# Altium PCB PeltierDrv_part.PcbDoc
Units mm, origin at the board's own origin, x right, y up, seen from the top; angles counter-clockwise.
Board outline 50 x 50 mm, 2 copper layers (Top Layer, Bottom Layer); 53 components, 47 nets, 194 pads, 31 vias.
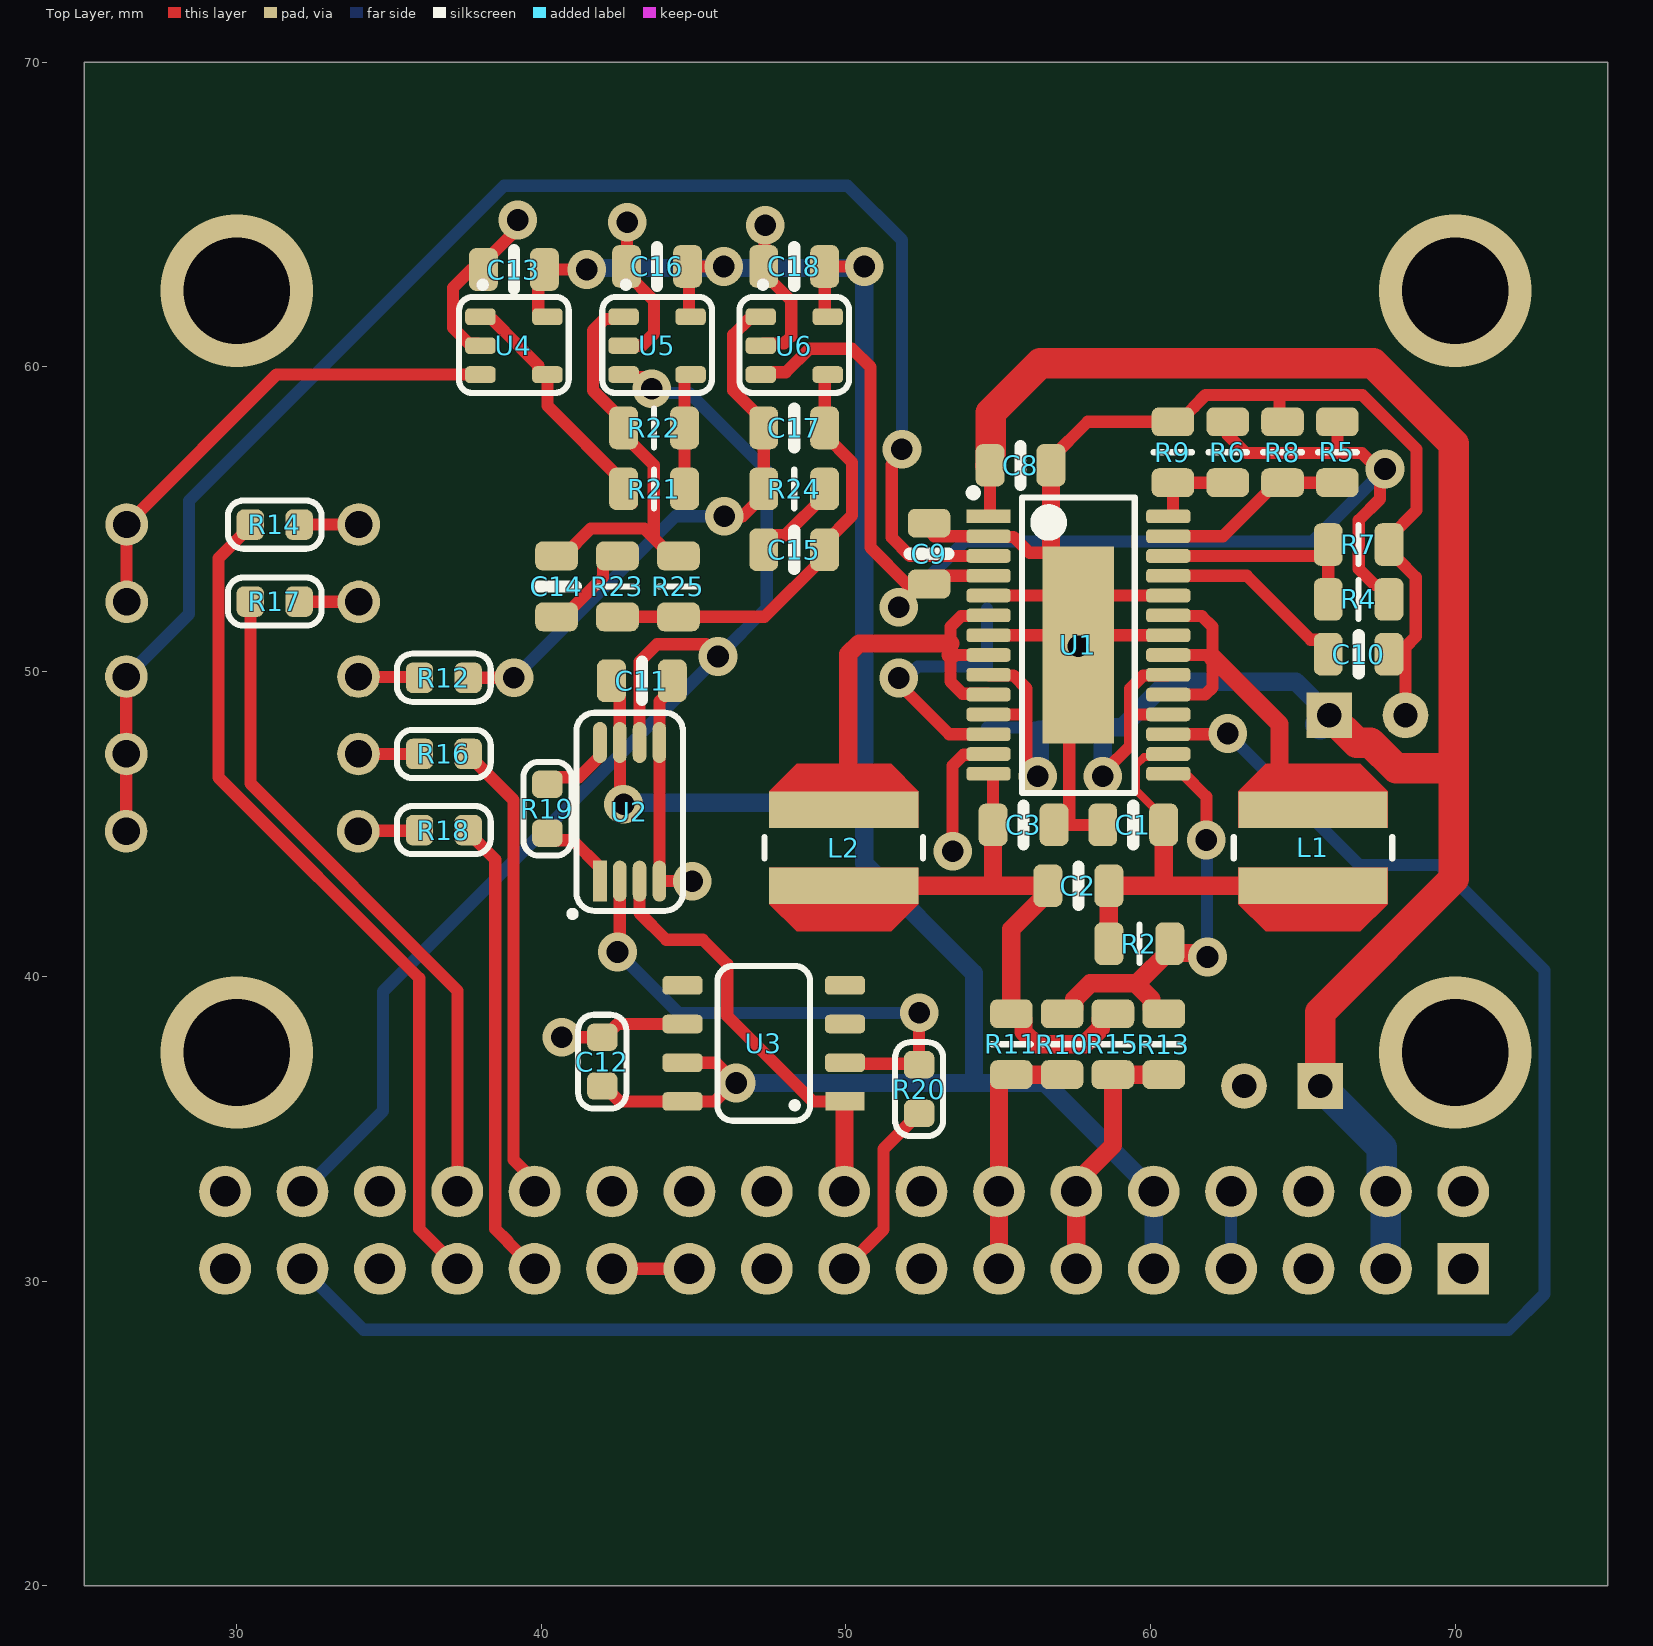
[diagram p0: Top Layer view]
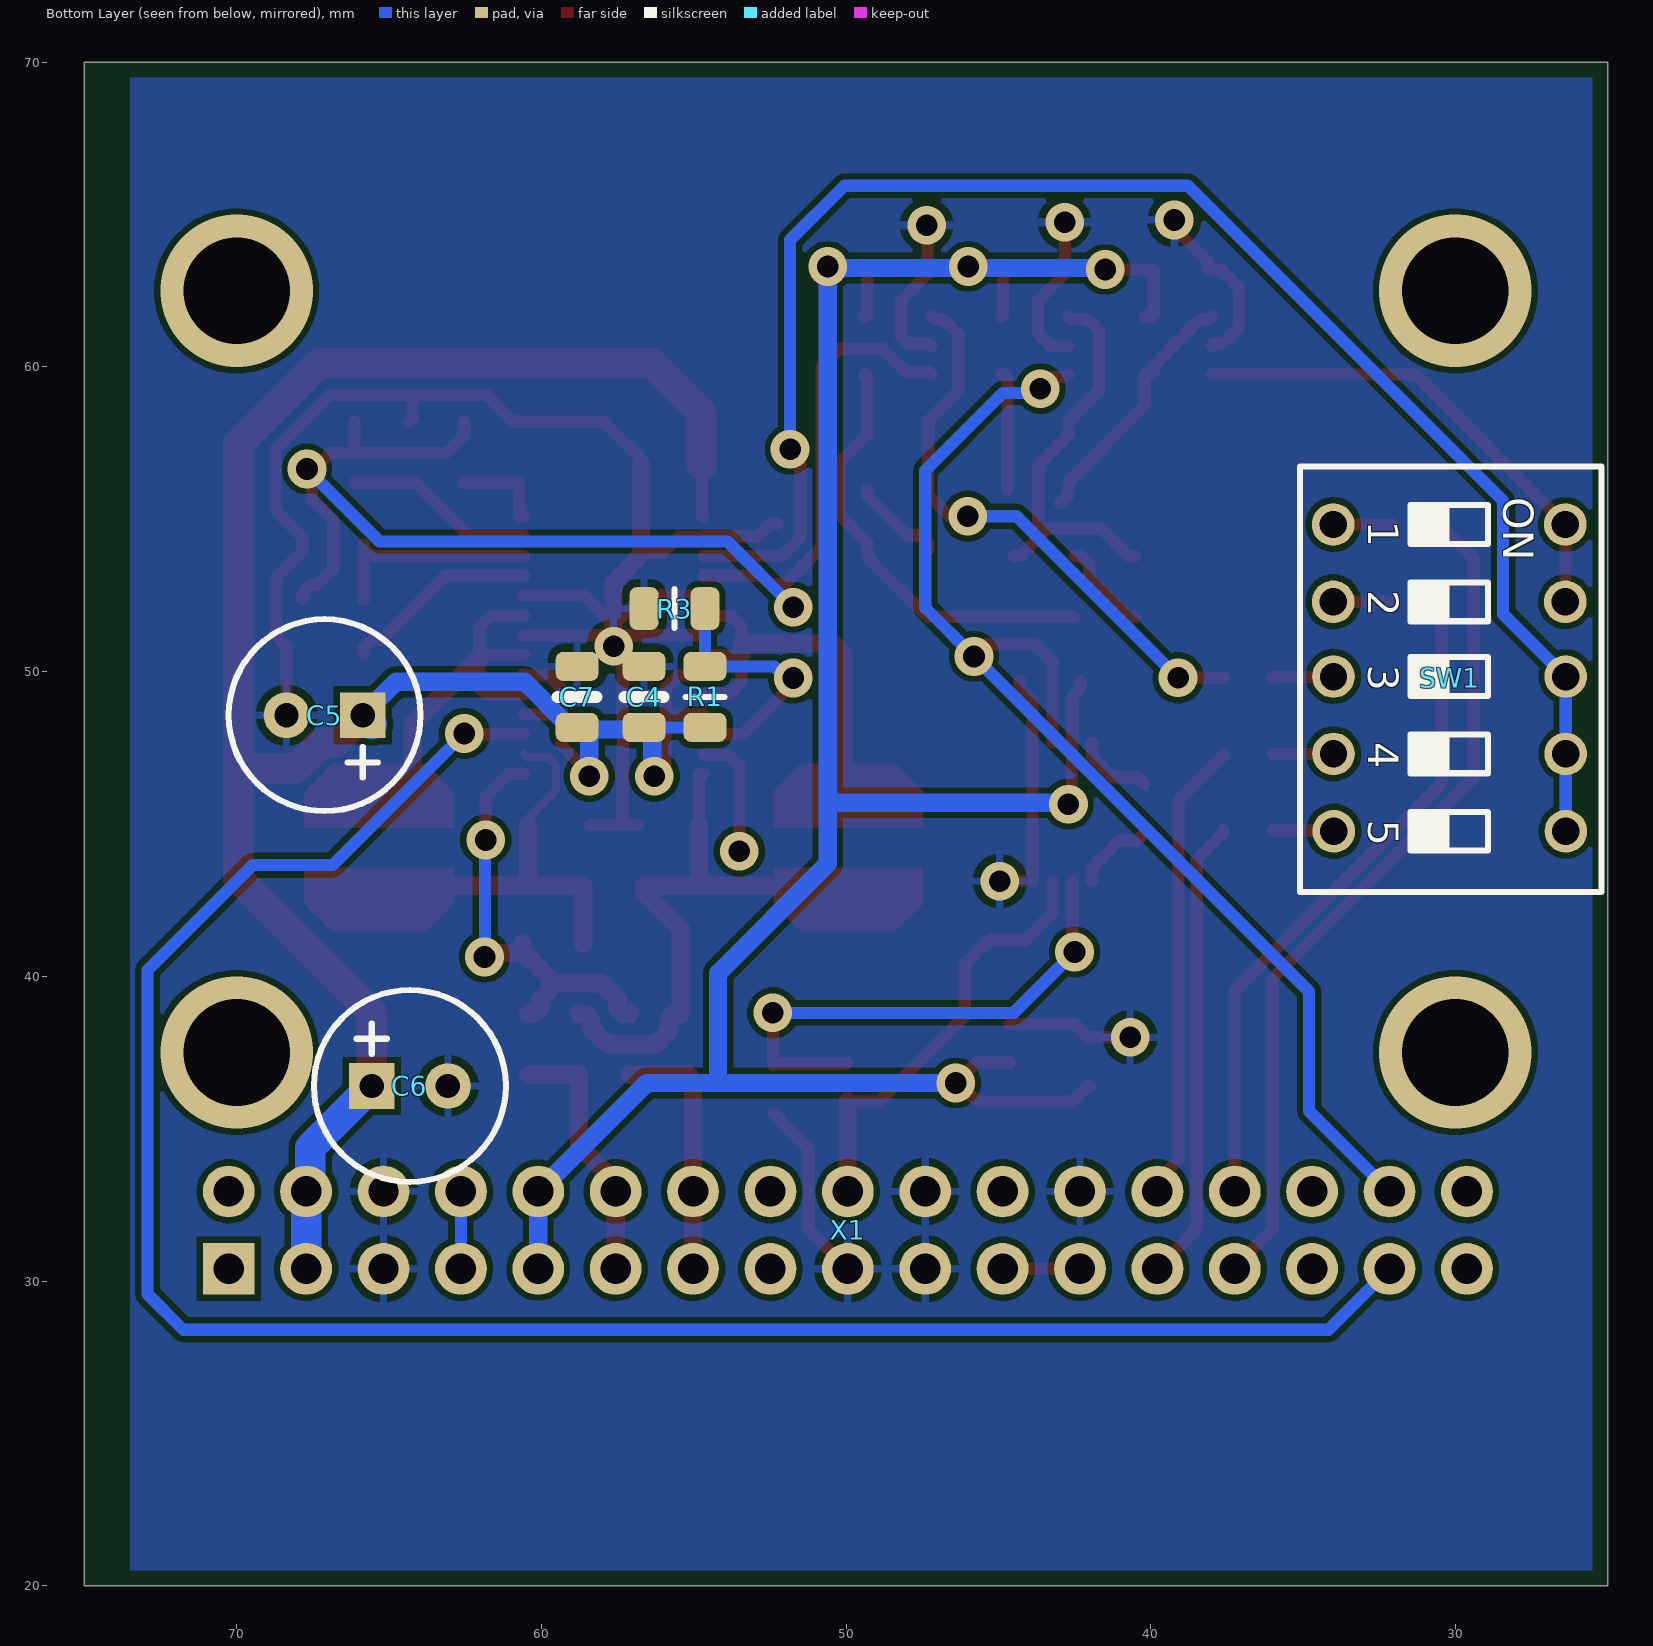
[diagram p1: Bottom Layer view, seen from below]
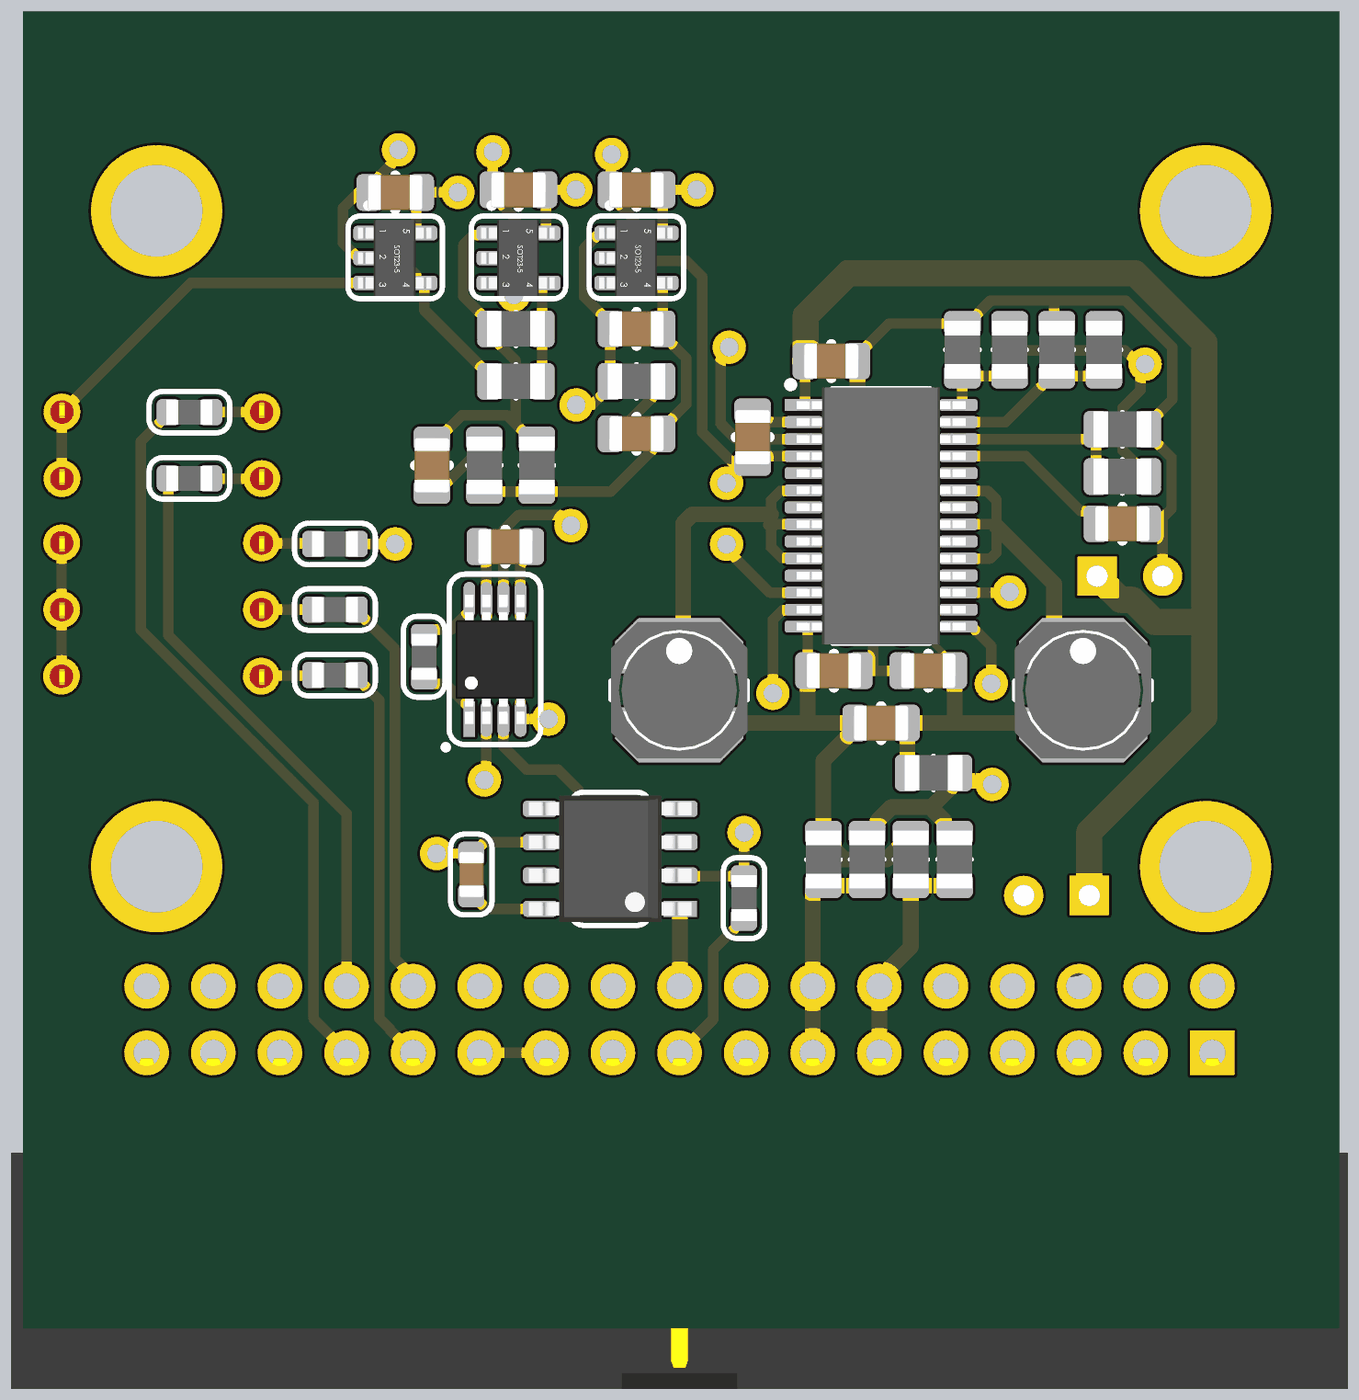
[diagram p2: 3D render of the assembled board from above, using the file's embedded part models]
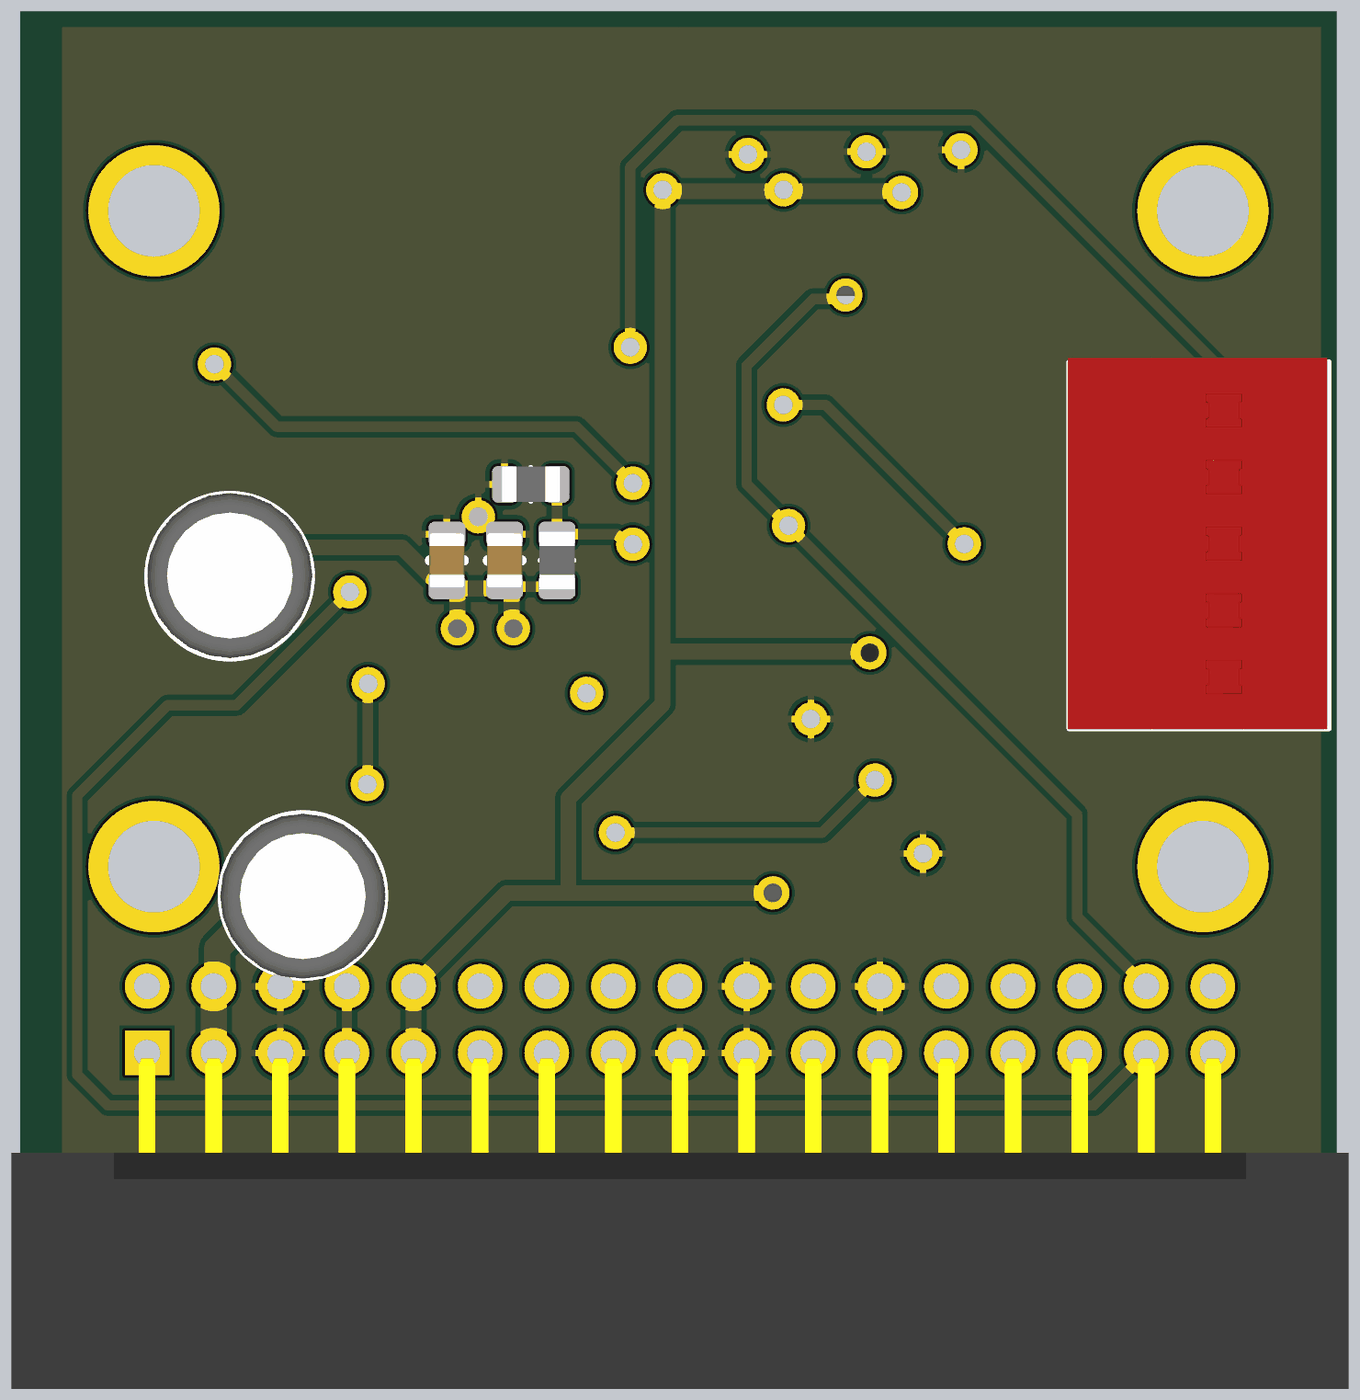
[diagram p3: 3D render of the assembled board from below, using the file's embedded part models]

## Layer stack, top to bottom
Top Solder: solder mask 0.0102, Solder Resist, Dk 3.5
Top Layer: signal copper 0.0356
Dielectric 1: dielectric 0.32, FR-4, Dk 4.8
Bottom Layer: signal copper 0.0356
Bottom Solder: solder mask 0.0102, Solder Resist, Dk 3.5

## Board outline
25,20 75,20 75,70 25,70

## Design rules (kind name [scope] priority, off if disabled: settings)
Clearance [All] p1: gap=0.2 ignorepadtopadclearanceinfootprint=FALSE
PolygonConnect [All] p1: connectstyle=Relief reliefconductorwidth=0.254 reliefentries=4 polygonreliefangle="90 Angle" airgapwidth=0.254
RoutingVias [All] p1: holewidth=0.711 width=1.27 viastyle="Through Hole" minholewidth=0.711 minwidth=1.27 maxholewidth=0.711 maxwidth=1.27
SolderMaskExpansion [All] p1: expansion=0.102 istentingtop=FALSE
Width [All] p1: maxlimit=10 minlimit=0.254 preferedwidth=0.5
30 further rules are at their usual default settings.

## Classes and differential pairs
component class TEMP: C11 C12 R19 R20 U2 U3
component class REG: C13 C14 C15 C16 C17 C18 R21 R22 R23 R24 R25 U4 U5 U6
component class main: R10 R11 R12 R13 R14 R15 R16 R17 R18 SW1 X1
component class DRV: C1 C2 C3 C4 C5 C6 C7 C8 C9 C10 J? L1 L2 R1 R2 R3 R4 R5 R6 R7 R8 R9 U1

## Components (designator, comment, footprint, x,y, rotation, side; value= is the part's Value field where it differs from the comment)
C1 "0603 1u 6.3V" CAP_0805 59.428,44.972 r180 top
C2 "0805 10u 6.3V" CAP_0805 57.628,42.972 r180 top
C3 "0603 1u 6.3V" CAP_0805 55.828,44.972 r0 top
C4 "0603 1u 6.3V" CAP_0805 56.628,49.172 r90 bottom
C5 "47u 63V" "CAP 6.3x11" 67.128,48.572 r180 bottom
C6 "47u 63V" "CAP 6.3x11" 64.3,36.4 r0 bottom
C7 "0603 1u 6.3V" CAP_0805 58.828,49.172 r90 bottom
C8 "0603 1u 6.3V" CAP_0805 55.728,56.772 r0 top
C9 "0603 0.1u 6.3V" CAP_0805 52.728,53.872 r90 top
C10 "0603 1u 6.3V" CAP_0805 66.828,50.572 r0 top
C11 "0603 1u 6.3V" CAP_0805 43.3,49.7 r180 top
C12 "0603 1u 6.3V" CAP_0603 42,37.2 r270 top
C13 "100n" CAP_0805 39.1,63.2 r180 top
C14 "100n" CAP_0805 40.5,52.8 r270 top
C15 "100n" CAP_0805 48.3,54 r180 top
C16 "100n" CAP_0805 43.8,63.3 r180 top
C17 "100n" CAP_0805 48.3,58 r180 top
C18 "100n" CAP_0805 48.3,63.3 r180 top
L1 "LQH5BPN3R3NT0L" IND_5050 65.328,44.222 r90 top
L2 "LQH5BPN3R3NT0L" IND_5050 49.928,44.222 r90 top
R1 "0805 ?" RES_0805 54.628,49.172 r270 bottom
R2 "0805 50m" RES_0805 59.628,41.072 r0 top
R3 "0805 ?" RES_0805 55.628,52.072 r180 bottom
R4 "0805 ?" RES_0805 66.828,52.372 r0 top
R5 "0805 ?" RES_0805 66.128,57.202 r90 top
R6 "0805 ?" RES_0805 62.528,57.202 r90 top
R7 "0805 ?" RES_0805 66.828,54.172 r180 top
R8 "0805 ?" RES_0805 64.328,57.202 r270 top
R9 "0805 ?" RES_0805 60.728,57.202 r270 top
R10 "0" RES_0805 57.095,37.772 r270 top
R11 "0" RES_0805 55.428,37.772 r270 top
R12 "200" RES_0603 36.8,49.8 r180 top
R13 "0" RES_0805 60.428,37.772 r270 top
R14 "200" RES_0603 31.25,54.825 r0 top
R15 "0" RES_0805 58.761,37.772 r270 top
R16 "200" RES_0603 36.8,47.3 r180 top
R17 "200" RES_0603 31.25,52.3 r0 top
R18 "200" RES_0603 36.8,44.8 r180 top
R19 "?" RES_0603 40.2,45.5 r90 top
R20 "?" RES_0603 52.4,36.3 r90 top
R21 "?" RES_0805 43.7,56 r0 top
R22 "?" RES_0805 43.7,58 r180 top
R23 "?" RES_0805 42.5,52.8 r270 top
R24 "?" RES_0805 48.3,56 r180 top
R25 "?" RES_0805 44.5,52.8 r270 top
SW1 "?" SWD1-5 30.199,53.56 r180 bottom
U1 "MAX1968" TSSOP28+EP 57.628,50.872 r0 top
U2 "INA333" MSOP-8 42.9,45.4 r90 top
U3 "REF200" SO8-150 47.3,37.8 r180 top
U4 "AD8065ART" sot235 39.1,60.7 r270 top
U5 "AD8065ART" sot235 43.8,60.7 r270 top
U6 "AD8065ART" sot235 48.3,60.7 r270 top
X1 "?" BH-34 70.26,32.94 r180 bottom

## Footprints (in the part's own frame and the unit in brackets; to place one, negate y for a bottom-side part, rotate by r counter-clockwise, add the part's x,y. Pads: shape width x height; smd on the part's side, far side on the other; paste and mask are expansions set on the pad)
BH-34 [mm]
  rect 1.7x1.7 hole 1: 1(0,-2.54)
  round 1.7 hole 1: 2(0,0) 3(2.54,-2.54) 4(2.54,0) 5(5.08,-2.54) 6(5.08,0) 7(7.62,-2.54) 8(7.62,0) 9(10.16,-2.54) 10(10.16,0) 11(12.7,-2.54) 12(12.7,0) 13(15.24,-2.54) 14(15.24,0) 15(17.78,-2.54) 16(17.78,0) 17(20.32,-2.54) 18(20.32,0) 19(22.86,-2.54) 20(22.86,0) 21(25.4,-2.54) 22(25.4,0) 23(27.94,-2.54) 24(27.94,0) 25(30.48,-2.54) 26(30.48,0) 27(33.02,-2.54) 28(33.02,0) 29(35.56,-2.54) 30(35.56,0) 31(38.1,-2.54) 32(38.1,0) 33(40.64,-2.54) 34(40.64,0)
  body extent -5.17,-15.35 45.81,-2.75, height 8.67
"CAP 6.3x11" [mm] "Capacitor"
  rect 1.5x1.5 hole 0.8: 1(1.266,-0.001)
  round 1.5 hole 0.8: 2(-1.234,-0.001)
  silkscreen extent -3.13,-3.15 3.17,3.15, body extent -3.13,-3.13 3.17,3.17, height 11.2
CAP_0603 [mm] "Chip Resistor, EIA 0603, Metric 1608, Body 1.6x0.8mm, IPC Medium Density"
  rrect50% 0.9x1 smd: 1(-0.8,0) 2(0.8,0)
  silkscreen extent -1.54,-0.79 1.54,0.79, body extent -0.88,-0.48 0.87,0.48, height 0.85
CAP_0805 [mm] "Chip Resistor, EIA 0805, Metric 2012, Body 2.0x1.2mm, IPC Medium Density"
  rrect50% 0.95x1.4 smd: 1(-1,0) 2(1,0)
  silkscreen extent 0,-0.64 0,0.64, body extent -1.05,-0.67 1.05,0.68, height 0.9
IND_5050 [mm] "SMD Inductor, 5mm L X 5mm W X 2mm H, TDK VLCF5020-1 Case"
  rect 1.2x4.9 smd: 1(-1.25,0) 2(1.25,0)
  Top Layer region: 2.75,1.55 1.85,2.45 0.65,2.45 0.65,-2.45 1.85,-2.45 2.75,-1.55
  Top Layer region: -2.75,-1.55 -1.85,-2.45 -0.65,-2.45 -0.65,2.45 -1.85,2.45 -2.75,1.55
  silkscreen extent -0.35,-2.6 0.35,2.6, body extent -2.6,-2.6 2.6,2.6, height 2
MSOP-8 [mm]
  rect 1.35x0.45 smd: 1(-2.275,0.975)
  oval 1.35x0.45 smd: 2(-2.275,0.325) 3(-2.275,-0.325) 4(-2.275,-0.975) 5(2.275,-0.975) 6(2.275,-0.325) 7(2.275,0.325) 8(2.275,0.975)
  silkscreen extent -3.45,-1.75 3.25,1.97, body extent -2.46,-1.5 2.46,1.5, height 1.1
RES_0603 [mm] "Chip Resistor, EIA 0603, Metric 1608, Body 1.6x0.8mm, IPC Medium Density"
  rrect50% 0.9x1 smd: 1(-0.8,0) 2(0.8,0)
  silkscreen extent -1.54,-0.79 1.54,0.79, body extent -0.87,-0.47 0.88,0.48, height 0.55
RES_0805 [mm] "Chip Resistor, EIA 0805, Metric 2012, Body 2.0x1.2mm, IPC Medium Density"
  rrect50% 0.95x1.4 smd: 1(-1,0) 2(1,0)
  silkscreen extent 0,-0.64 0,0.64, body extent -1.1,-0.67 1.1,0.68, height 0.6
SO8-150 [mil]
  rect 50x24 smd mask+4: 1(-105,75)
  rrect50% 52x24 smd mask+4: 2(-105,25) 3(-105,-25) 4(-105,-75) 5(105,-75) 6(105,-25) 7(105,25) 8(105,75)
  silkscreen extent -60,-100 60,100, body extent -122,-95 122,95, height 67
sot235 [mm] "SOT23, 5-Leads, Body 2.9x1.3mm, Pitch 0.95mm, Lead Span 2.5mm"
  rrect50% 0.55x1 smd: 1(-0.95,-1.1) 2(0,-1.1) 3(0.95,-1.1) 4(0.95,1.1) 5(-0.95,1.1)
  silkscreen extent -2.1,-1.8 1.55,1.8, body extent -1.45,-1.42 1.45,1.38, height 1.09
SWD1-5 [mm] "Body 7.1x7.5mm, 2 Ways SPST DIP Switch, Thru Hole, TYCO AD Series"
  round 1.4 hole 0.9: 1(-3.81,1.27) 2(-3.81,-1.27) 3(-3.801,-3.72) 4(-3.801,-6.26) 5(-3.791,-8.8) 6(3.829,-8.8) 7(3.819,-6.26) 8(3.819,-3.72) 9(3.81,-1.27) 10(3.81,1.27)
  silkscreen extent -4.9,-10.79 5,3.18, body extent -4.95,-10.83 4.95,3.33, height 6.8
TSSOP28+EP [mm] "SOP, 0.65mm pitch; 28 pin, 4.50mm W X 9.70mm L (thermal tab 6.46 X 2.35mm), IPC Medium Density"
  rect 1.45x0.45 smd: 1(-2.95,4.225)
  rrect50% 1.45x0.45 smd: 2(-2.95,3.575) 3(-2.95,2.925) 4(-2.95,2.275) 5(-2.95,1.625) 6(-2.95,0.975) 7(-2.95,0.325) 8(-2.95,-0.325) 9(-2.95,-0.975) 10(-2.95,-1.625) 11(-2.95,-2.275) 12(-2.95,-2.925) 13(-2.95,-3.575) 14(-2.95,-4.225) 15(2.95,-4.225) 16(2.95,-3.575) 17(2.95,-2.925) 18(2.95,-2.275) 19(2.95,-1.625) 20(2.95,-0.975) 21(2.95,-0.325) 22(2.95,0.325) 23(2.95,0.975) 24(2.95,1.625) 25(2.95,2.275) 26(2.95,2.925) 27(2.95,3.575) 28(2.95,4.225)
  rect 2.35x6.46 smd: 29(0,0)
  silkscreen extent -3.57,-4.85 1.85,5.12, body extent -3.22,-4.9 3.22,4.9, height 1.2

## Part data
C1 C2 C3 C4 C7 C8 C9 C10 C11 C12 C13 C14 C15 C16 C17 C18: library part Capacitor, "Конденсатор"
C5 C6: library part CapacitorEl, "Конденсатор электролитический", ValueBOM=47u, ValueSCH="47u 63V"
L1 L2: library part IND, "Индуктивность"
R1 R2 R3 R4 R5 R6 R7 R8 R9 R19 R20 R21 R22 R23 R24 R25: library part Resisitor, "Резистор"
R10 R11 R12 R13 R14 R15 R16 R17 R18: library part Resisitor, "Резистор", ValueBOM="0805 10k 0.125", ValueSCH=10k, MarkPCB=103
SW1: library part SWD1-5, "Переключатель 2 группы прямой: / SWD1-5; / DS1040-05RN; / DS1040-05BN; / BD05"
U1: "Драйвер пельтье"
U2: "Инструментальный усилитель", HelpURL=C:\Datasheets\INA333.pdf, MarkPCB=INA333, ValueBOM=INA333, ValueSCH=INA333
U3: "Источник опорного тока", HelpURL=C:\Datasheets\REF200.pdf, MarkPCB=REF200, ValueBOM=REF200, ValueSCH=REF200
U4 U5 U6: library part "OPAMP SOT235", "Операционный усилитель"
X1: library part "Connector 17x2", ValueSCH=Model

## Via types
v1: diameter 1.27, hole 0.711, Top Layer to Bottom Layer, 27 vias
v2: diameter 5, hole 3.5, Top Layer to Bottom Layer, 4 vias

## Nets (pads, with @x,y where several pads share a name; then routed paths per layer and width w, separated by ;. In a path a pad name is that pad's centre, name@x,y a point inside that pad or via, vN(x,y) a via of type N, cw(c..) or ccw(c..) an arc to the next point about the centre after c; other vN are vias at no path point)
1.5REF: C9.1 R4.2 R5.2 R6.2 U1.4 U6.3 | length 45.7
  Top Layer w0.4: U6.3 47.275,59.825 48.025,59.825 48.8,60.6 50.2,60.6 50.8,60 50.8,54.075 52.003,52.872 C9.1@52.228,52.872 ; v1(51.735,52.118) 51.735,52.353 52.228,52.846 C9.1@52.228,52.872 ; U1.4 52.748,53.147 52.473,52.872 C9.1@52.228,52.872 ; R6.2 62.528,57.772 63.128,57.172 66.028,57.172 ; R5.2 66.128,57.272 66.028,57.172 ; R4.2 67.828,52.577 67.556,52.849 67.351,52.849 67.128,53.072 66.828,53.372 66.828,54.972 67.526,55.67 67.526,56.488 v1(67.692,56.654) 67.457,56.654 66.939,57.172 66.028,57.172
  Bottom Layer w0.4: v1(51.735,52.118) 53.889,54.272 65.31,54.272 v1(67.692,56.654)
!SHDN: U1.17 X1.31 | length 68.3
  Top Layer w0.4: U1.17 62.503,47.947 v1(62.528,47.972)
  Bottom Layer w0.4: X1.31 34.16,28.4 71.75,28.4 72.925,29.575 72.925,40.2 69.475,43.65 66.85,43.65 v1(62.528,47.972)
+2.5VREF: X1.2
+3.3V: C11.2 C12.2 C13.1 C16.1 C18.1 U2.7 U3.7 U3.8 U4.5 U5.5 U6.5 X1.9 X1.10 | length 83.3
  Top Layer w0.4: C13.1@39.9,63.2 39.9,61.725 39.975,61.65 U4.5 ; C13.1 41.3,63.2 v1(41.49,63.2) ; C12.2 42.064,36.4 42.569,35.895 U3.8 45.695,35.895 46.3,36.5 v1(46.4,36.5) 45.735,37.165 U3.7 ; C11.2 42.3,49.455 42.575,49.18 U2.7 42.585,47.665 42.585,45.765 v1(42.7,45.65) ; U5.5 44.85,61.7 44.85,63.25 C16.1 v1(45.99,63.3) ; U6.5 49.375,61.65 49.3,61.725 C18.1 50.3,63.3 v1(50.6,63.3)
  Bottom Layer w0.6: v1(41.49,63.2) 41.54,63.25 45.99,63.25 50.55,63.25 v1(50.6,63.3) 50.6,45.7 ; v1(42.7,45.65) 42.75,45.7 50.6,45.7 ; v1(46.4,36.5) 54.2,36.5 ; X1.9 X1.10 56.54,36.5 54.2,36.5 ; 50.6,45.7 50.6,43.7 54.2,40.1 54.2,36.5
+5V: C4.1 C5.1 C6.1 C7.1 C8.1 R1.2 U1.1 U1.9 U1.11 U1.18 U1.20 X1.3 X1.4 | length 81.8
  Top Layer w0.4: U1.11 55.903,48.597 55.928,48.572 ; U1.9 54.703,49.872 55.503,49.872 55.928,49.447 55.928,48.572 ; U1.1 54.703,55.097 54.728,55.122 C8.1 ; v1(56.293,46.572) 56.293,46.607 55.928,46.972 55.928,48.572 ; v1(58.428,46.572) 58.528,46.672 58.528,46.772 59.328,47.572 59.328,48.51 ; U1.18 59.415,48.597 59.328,48.51 ; U1.20 60.553,49.872 59.753,49.872 59.328,49.447 59.328,48.51
  Top Layer w1: C8.1 54.753,56.797 54.753,58.503 56.375,60.125 67.3,60.125 69.95,57.475 69.95,46.825 ; C6.1 65.566,38.816 69.95,43.2 69.95,46.825 ; C5.1 66.761,47.672 67.21,47.672 68.057,46.825 69.95,46.825
  Bottom Layer w0.4: R1.2 56.293,48.172 C4.1@56.36,48.105
  Bottom Layer w0.6: v1(56.293,46.572) 56.36,46.64 C4.1@56.36,48.105 ; C4.1 56.7,48.1 58.228,48.1 58.428,47.9 v1(58.428,46.572) ; C7.1 59.053,48.172 60.553,49.672 64.761,49.672 C5.1
  Bottom Layer w1: C6.1 67.586,34.381 67.586,33.074 X1.4 X1.3 ; C5.1@65.566,48.274 C5.1
-2.5VREF: X1.1
-5V: X1.7 X1.8 | length 2.5
  Bottom Layer w0.4: X1.7 X1.8
EXT_GAIN: X1.33
GND: C1.2 C3.2 C4.2 C5.2 C6.2 C7.2 C8.2 C9.2 C10.2 C11.1 C12.1 C13.2 C16.2 C18.2 R3.1 R7.1 R8.1 R9.1 R20.1 U1.2 U1.5 U1.7 U1.22 U1.24 U1.29 U2.4 U2.5 U3.6 U4.2 U5.2 U6.2 X1.5 X1.6 X1.17 X1.19 X1.20 X1.24 | length 89.9
  Top Layer w0.4: U4.2 37.925,60.775 37.615,60.775 37.1,61.29 37.1,62.6 37.7,63.2 C13.2 38.1,63.425 39.175,64.5 39.175,64.775 v1(39.225,64.825) ; v1(40.675,38) C12.1 42.064,38 42.499,38.435 U3.6 ; U5.2 43.3,60.7 43.7,61.1 43.7,62.175 42.8,63.075 C16.2 42.813,63.312 42.813,64.738 v1(42.825,64.75) ; C11.1 44.3,49.455 43.875,49.03 U2.5 U2.4 v1(44.95,43.125) ; U6.2 47.275,60.775 47.966,60.775 48.2,61.009 48.2,62.175 47.3,63.075 C18.2 47.325,63.325 47.325,64.625 v1(47.35,64.65) ; X1.17 51.23,31.69 51.23,34.33 52.115,35.215 52.115,35.252 52.364,35.5 R20.1 ; C9.2@52.228,54.872 52.473,54.872 52.898,54.447 U1.2 54.703,54.422 55.503,54.422 56.023,53.902 56.653,53.902 U1.29@56.728,53.827 ; U1.7 57.303,51.197 U1.29 57.953,51.197 U1.22 ; U1.5 56.653,52.497 57.628,51.522 58.603,52.497 U1.24 ; C8.2 56.728,56.997 57.933,58.202 R9.1 60.933,58.202 61.428,58.698 61.428,58.704 61.801,59.077 64.228,59.077 ; C3.2 57.328,44.972 ; U1.29@57.328,50.572 57.328,44.972 ; C1.2 57.328,44.972 ; R8.1 64.228,58.302 64.228,59.077 ; C5.2 68.362,50.813 68.703,51.154 68.703,53.099 68.106,53.695 68.1,53.695 67.828,53.967 R7.1 67.828,54.397 68.727,55.297 68.727,57.298 66.948,59.077 64.228,59.077
  Top Layer w0.6: C8.2 56.728,53.827 57.628,52.927 57.628,51.522 U1.29
  other v1: 57.628,50.837
HV: X1.22
HV_COVER: X1.21 X1.23 | length 2.5
  Top Layer w0.4: X1.23 X1.21
NetC1_1: C1.1 C2.1 L1.1 R2.1 U1.16 | length 13.2
  Top Layer w0.254: C1.1 60.428,45.197 59.526,46.099 59.526,46.942 59.783,47.199 60.48,47.199 U1.16
  Top Layer w0.6: R2.1 C2.1 60.328,42.972 ; C1.1 60.428,43.072 60.328,42.972 ; L1.1@64.328,42.972 60.328,42.972
NetC2_2: C2.2 C3.1 L2.1 R11.1 R15.1 U1.14 | length 18.8
  Top Layer w0.4: U1.14 54.803,46.647 54.828,46.622 C3.1
  Top Layer w0.6: L2.1@50.928,42.972 54.828,42.972 ; C3.1 54.828,42.972 ; R15.1 58.536,38.772 58.361,38.597 58.361,38.296 57.837,37.772 56.228,37.772 55.828,38.172 55.828,38.597 55.653,38.772 R11.1 55.428,41.547 56.628,42.747 C2.2 54.828,42.972
NetC10_1: C10.1 U1.25 | length 6.4
  Top Layer w0.4: U1.25 63.153,53.147 65.251,51.049 65.556,51.049 65.828,50.777 C10.1
NetC14_1: C14.1 R22.2 R25.1 U5.1 | length 13.6
  Top Layer w0.4: C14.1 40.725,53.8 41.625,54.7 43.375,54.7 43.688,54.387 ; U5.1 42.625,61.575 42.075,61.575 41.7,61.2 41.7,59.225 42.7,58.225 R22.2 42.7,57.775 43.688,56.787 43.688,54.387 ; R25.1 44.275,53.8 43.688,54.387
NetC14_2: C14.2 R23.1 | length 3.1
  Top Layer w0.4: C14.2 40.725,51.8 42.023,53.098 42.023,53.528 42.295,53.8 R23.1
NetC15_1: C15.1 C17.1 R23.2 R25.2 U6.4 | length 14.4
  Top Layer w0.4: R23.2 R25.2 47.325,51.8 49.3,53.775 C15.1 49.3,54.225 50.2,55.125 50.2,56.875 49.3,57.775 C17.1 49.3,59.675 49.375,59.75 U6.4
NetC15_2: C15.2 R24.1 | length 3.1
  Top Layer w0.4: C15.2 47.3,54.205 47.572,54.477 48.002,54.477 49.3,55.775 R24.1
NetL1_2: L1.2 U1.19 U1.21 U1.23 | length 13.5
  Top Layer w0.4: U1.19 61.794,49.247 62.028,49.481 62.028,50.477 ; U1.21 61.958,50.547 62.028,50.477 ; U1.23 60.603,51.822 61.678,51.822 62.028,51.472 62.028,50.477
  Top Layer w0.6: 62.028,50.477 64.228,48.277 64.228,45.772 64.528,45.472 L1.2
NetL2_2: L2.2 U1.6 U1.8 U1.10 | length 13.7
  Top Layer w0.4: 53.453,50.547 U1.8 ; U1.10 54.653,49.272 53.828,49.272 53.428,49.672 53.428,50.547 53.428,50.925 53.428,51.472 53.778,51.822 54.653,51.822 U1.6
  Top Layer w0.6: 49.95,46.3 50.075,46.425 50.075,50.574 50.426,50.925 53.428,50.925 ; 53.428,50.547 53.453,50.547
NetR1_1: R1.1 R3.2 U1.12 | length 8.8
  Top Layer w0.4: v1(51.735,49.79) 51.735,49.602 53.39,47.947 U1.12
  Bottom Layer w0.4: v1(51.735,49.79) 51.97,49.79 52.353,50.172 R1.1 R3.2
NetR2_2: R2.2 R10.1 R13.1 U1.15 | length 14.5
  Top Layer w0.4: U1.15 61.078,46.647 61.828,45.897 v1(61.828,44.472)
  Top Layer w0.6: R10.1 57.32,38.772 57.495,38.947 57.495,39.248 58.018,39.772 59.504,39.772 ; R13.1 60.203,38.772 60.028,38.947 60.028,39.248 59.504,39.772 ; R2.2 R2.2@60.628,40.847 ; v1(61.864,40.636) 61.736,40.764 60.711,40.764 R2.2@60.628,40.847 ; 59.504,39.772 59.553,39.772 R2.2@60.628,40.847
  Bottom Layer w0.4: v1(61.828,44.472) 61.846,44.454 61.846,40.654 v1(61.864,40.636)
NetR4_1: R4.1 R7.2 U1.26 | length 7.2
  Top Layer w0.4: U1.26 65.556,53.797 R7.2@65.828,54.069 ; R4.1 R7.2@65.828,54.069 ; R7.2 R7.2@65.828,54.069
NetR5_1: R5.1 R8.2 U1.27 | length 6.3
  Top Layer w0.4: U1.27 62.374,54.447 63.851,55.924 63.851,55.93 64.123,56.202 R8.2 R5.1
NetR6_1: R6.1 R9.2 U1.28 | length 3
  Top Layer w0.4: U1.28 60.703,55.097 60.728,55.122 R9.2 R6.1
NetR12_2: R12.2 SW1.3 | length 2
  Top Layer w0.4: SW1.3 34.02,49.82 35.98,49.82 R12.2
NetR14_2: R14.2 SW1.1 | length 2
  Top Layer w0.4: R14.2 32.053,54.828 34.007,54.828 SW1.1 SW1.1@34.024,54.815
NetR16_2: R16.2 SW1.4 | length 2
  Top Layer w0.4: SW1.4 R16.2
NetR17_2: R17.2 SW1.2 | length 2
  Top Layer w0.4: R17.2 32.055,52.295 34.004,52.295 SW1.2 SW1.2@34.014,52.295
NetR18_2: R18.2 SW1.5 | length 2
  Top Layer w0.4: SW1.5 34.011,44.78 35.98,44.78 R18.2
NetR19_1: R19.1 U2.1 | length 2.6
  Top Layer w0.4: R19.1 40.435,44.465 41.035,44.465 41.925,43.575 U2.1
NetR19_2: R19.2 U2.8 | length 2.6
  Top Layer w0.4: R19.2 40.435,46.535 41.235,46.535 41.925,47.225 U2.8
NetR20_2: R20.2 U2.2 U3.2 | length 17.2
  Top Layer w0.4: v1(42.5,40.8) 42.575,40.875 U2.2 ; U3.2 49.999,37.133 52.368,37.133 R20.2 v1(52.4,38.8)
  Bottom Layer w0.4: v1(42.5,40.8) 44.5,38.8 v1(52.4,38.8)
NetR21_1: R21.1 U4.1 U4.4 | length 8.5
  Top Layer w0.4: U4.1 38.075,61.575 38.385,61.575 39.243,60.718 39.243,60.707 39.9,60.05 39.9,59.825 39.975,59.75 U4.4 40.2,58.725 42.7,56.225 R21.1 42.7,55.795 R21.1@42.972,55.523
NetR21_2: R21.2 R22.1 U5.4 | length 3.9
  Top Layer w0.4: R21.2 R22.1 44.7,59.675 44.775,59.75 U5.4
NetSW1_9: SW1.9 SW1.10 U4.3 | length 16.2
  Top Layer w0.4: SW1.9@26.409,52.27 SW1.9 SW1.10 31.309,59.75 U4.3 U4.3@37.98,59.77
RT2: U2.3 U3.1 X1.18 | length 14.3
  Top Layer w0.4: U2.3 43.225,42.075 44.1,41.2 45.3,41.2 46.1,40.4 46.1,38.7 48.91,35.89 U3.1@49.953,35.89
  Top Layer w0.6: X1.18 49.953,32.953 U3.1@49.953,35.89
TEC+: R10.2 R11.2 X1.13 X1.14 | length 8.3
  Top Layer w0.6: X1.13 X1.14 55.02,36.589 55.203,36.772 R11.2 R10.2
TEC-: R13.2 R15.2 X1.11 X1.12 | length 8.5
  Top Layer w0.6: X1.11 X1.12 57.56,33.247 58.761,34.448 R15.2 R13.2
TEC_CUR_MEAS: U1.13 | length 4.1
  Top Layer w0.4: v1(53.5,44.107) 53.5,46.919 53.853,47.272 54.653,47.272 U1.13
TEC_CUR_REG: C17.2 R12.1 R24.2 U6.1 | length 19
  Top Layer w0.4: R12.1 v1(39.1,49.8) ; v1(46,55.1) 46.605,55.1 47.3,55.795 R24.2 C17.2 47.3,58.225 46.3,59.225 46.3,61.06 46.815,61.575 47.125,61.575 U6.1
  Bottom Layer w0.4: v1(39.1,49.8) 44.4,55.1 v1(46,55.1)
TEC_CUR_SP: SW1.6 SW1.7 SW1.8 U1.3 | length 58.5
  Top Layer w0.4: SW1.6 26.375,44.765 26.375,49.835 SW1.8 ; v1(51.835,57.3) 51.8,57.265 51.8,57.1 51.5,56.8 51.5,54.4 52.103,53.797 U1.3
  Bottom Layer w0.4: SW1.6 26.375,44.765 26.375,49.835 SW1.8 28.432,51.892 28.432,55.607 38.775,65.95 50.05,65.95 51.835,64.165 v1(51.835,57.3)
TEC_CUR_SP1: R16.1 X1.26 | length 15.3
  Top Layer w0.4: R16.1 37.6,47.264 37.864,47 37.875,47 39.09,45.785 39.09,33.982 39.78,33.292 X1.26
TEC_CUR_SP2: R18.1 X1.25 | length 15.3
  Top Layer w0.4: R18.1 37.6,44.736 37.85,44.486 37.85,44.475 38.49,43.835 38.49,31.71 38.906,31.294 38.906,31.274 X1.25
TEMP_MEAS: U2.6 U5.3 X1.32 | length 41.7
  Top Layer w0.4: U5.3 42.775,59.675 43.386,59.675 43.62,59.441 v1(43.62,59.29) ; U2.6 43.225,50.325 43.8,50.9 45.4,50.9 v1(45.8,50.5)
  Bottom Layer w0.4: X1.32 34.8,35.58 34.8,39.5 v1(45.8,50.5) 47.4,52.1 47.4,56.6 44.855,59.145 43.765,59.145 v1(43.62,59.29)
TEMP_SP1: R14.1 X1.27 | length 28.1
  Top Layer w0.4: R14.1 30.45,54.775 29.4,53.725 29.4,46.526 35.99,39.936 35.99,31.71 37.24,30.46 X1.27
TEMP_SP2: R17.1 X1.28 | length 22.2
  Top Layer w0.4: R17.1 30.45,46.325 37.25,39.525 37.25,32.95 X1.28
pads on no net: U3.3 U3.4 U3.5 X1.15 X1.16 X1.29 X1.30 X1.34
copper on no net:
  other v2: 30,37.5 70,37.5 30,62.5 70,62.5

## Polygon pours and split planes (outlines as drawn)
GND on Bottom Layer "NONET_L-01_P-001" (solid, pour order 0): 25.5,69.5 25.5,20.5 73.5,20.5 73.5,69.5

## Silkscreen, mask and mechanical layers (free items; w line width, h text height)
Board:
  the board outline again, w0.2

## Text inside footprints (layer, text, board x,y; h text height)
SW1: Mechanical 14 "1" at 32.866,54.957 h1 r90; Mechanical 14 "2" at 32.866,52.671 h1 r90; Mechanical 14 "ON" at 28.421,55.719 h1 r90; Mechanical 14 "4" at 32.866,47.681 h1 r90; Mechanical 14 "5" at 32.866,45.141 h1 r90; Mechanical 14 "3" at 32.866,50.221 h1 r90; Bottom Overlay "1" at 32.866,54.957 h1 r90; Bottom Overlay "2" at 32.866,52.671 h1 r90; Bottom Overlay "ON" at 28.421,55.719 h1 r90; Bottom Overlay "3" at 32.866,50.221 h1 r90; Bottom Overlay "4" at 32.866,47.681 h1 r90; Bottom Overlay "5" at 32.866,45.141 h1 r90